# Altium PCB Darlington.PcbDoc
Units mm, origin at the board's own origin, x right, y up, seen from the top; angles counter-clockwise.
Board outline 100 x 100 mm, 2 copper layers (Top Layer, Bottom Layer); 14 components, 7 nets, 33 pads, 0 vias.
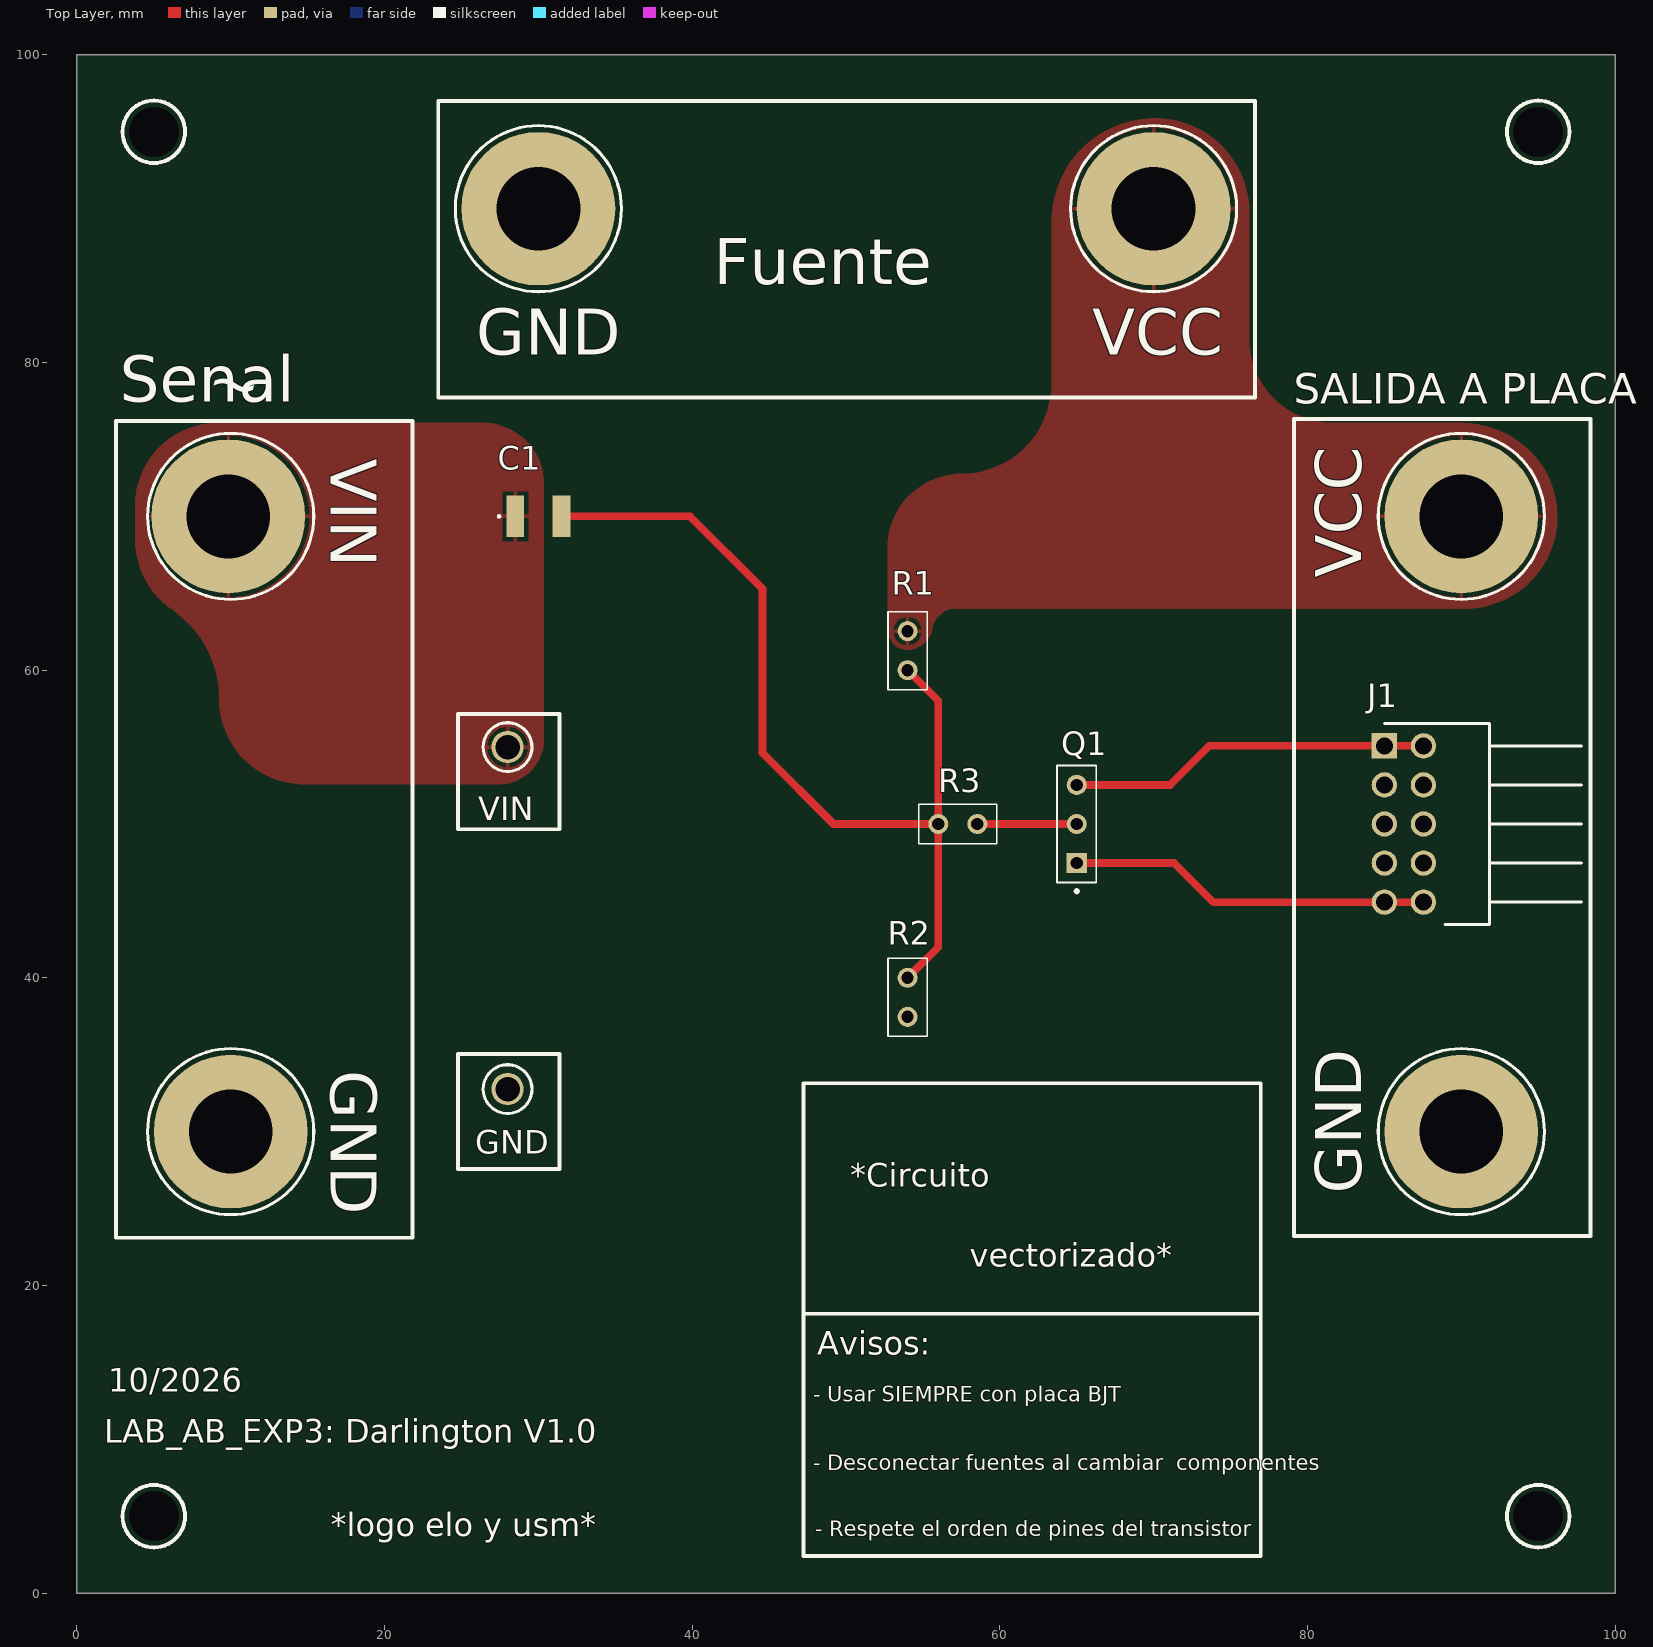
[diagram p0: Top Layer view]
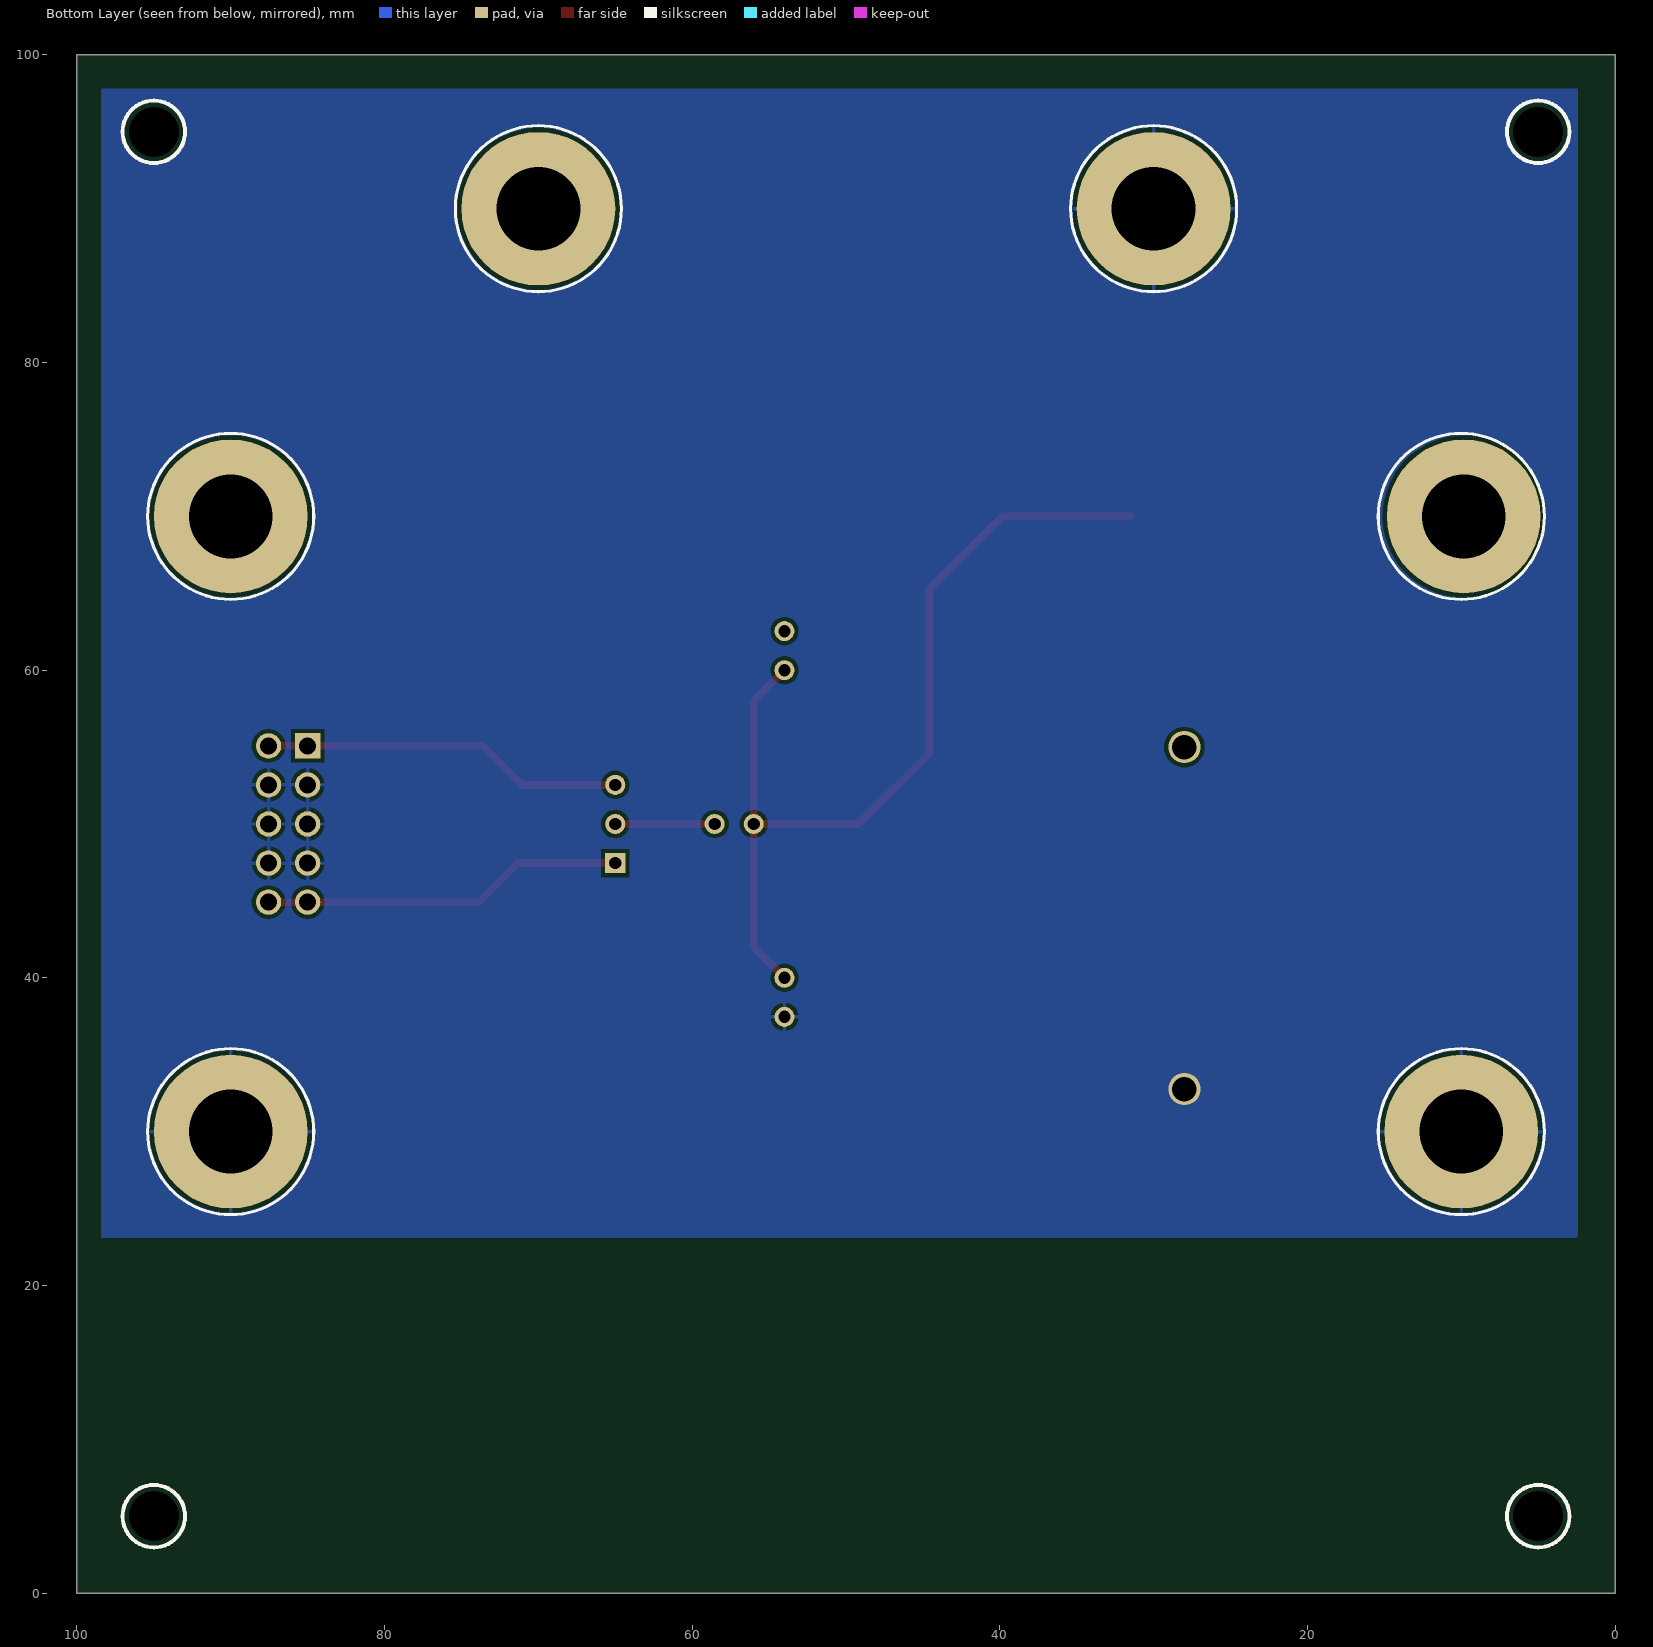
[diagram p1: Bottom Layer view, seen from below]
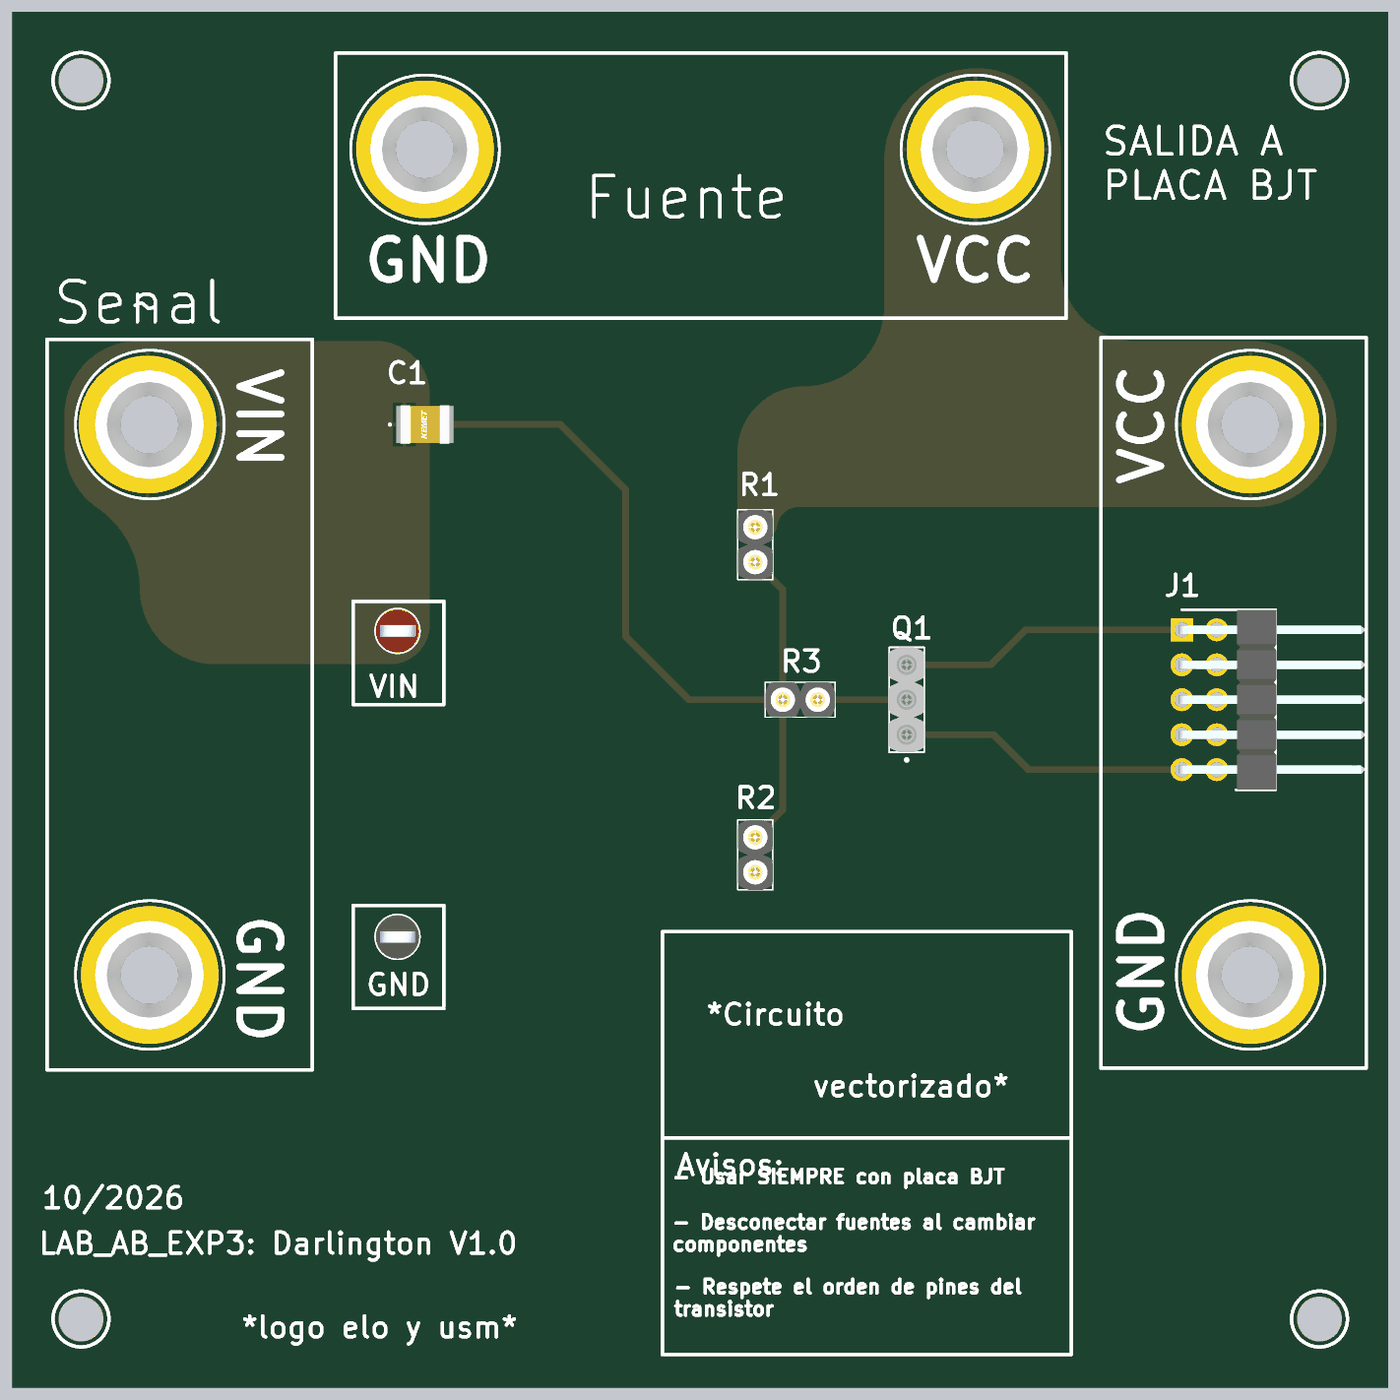
[diagram p2: 3D render of the assembled board from above, using the file's embedded part models]

## Layer stack, top to bottom
Top Solder: solder mask 0.0102, Solder Resist, Dk 3.5
Top Layer: signal copper 0.0356
Dielectric 1: dielectric 0.32, FR-4, Dk 4.8
Bottom Layer: signal copper 0.0356
Bottom Solder: solder mask 0.0102, Solder Resist, Dk 3.5

## Board outline
0,0 100,0 100,100 0,100

## Design rules (kind name [scope] priority, off if disabled: settings)
Clearance [All] p1: gap=0.254 ignorepadtopadclearanceinfootprint=FALSE
HoleSize [All] p1: absolutevalues=TRUE maxlimit=7 minlimit=0.025 maxpercent=80.000 minpercent=20.000
PolygonConnect [All] p1: connectstyle=Relief reliefconductorwidth=0.254 reliefentries=4 polygonreliefangle="90 Angle" airgapwidth=0.254
RoutingVias [All] p1: holewidth=0.711 width=1.27 viastyle="Through Hole" minholewidth=0.711 minwidth=1.27 maxholewidth=0.711 maxwidth=1.27
SolderMaskExpansion [All] p1: expansion=0 istentingtop=FALSE
SupplyNets "Schematic Supply Nets_2" [InNet('+VAC')] p1: voltage=0.000
SupplyNets "Schematic Supply Nets_1" [InNet('VCC')] p2: voltage=0.000
SupplyNets "Schematic Supply Nets" [InNet('GND')] p3: voltage=0.000
Width [All] p1: maxlimit=0.7 minlimit=0.254 preferedwidth=0.254
29 further rules are at their usual default settings.

## Classes and differential pairs
component class Darlington: C1 GND J1 Q1 Q6 R1 R2 R3 R12 R13 R14 VCC_IN VIN

## Components (designator, comment, footprint, x,y, rotation, side; value= is the part's Value field where it differs from the comment)
C1 "C1210C106M3PACTU" C1210 30,70 r0 top locked (schematic designator C2)
GND "575-4" KSTN-575-4#1 90,30 r0 top locked (schematic designator TP2)
GND "5011" KSTN-5011_V 28,32.766 r180 top (schematic designator TP26)
GND "575-4" KSTN-575-4#1 30,90 r0 top locked (schematic designator TP24)
GND "575-4" KSTN-575-4#1 10,30 r0 top locked (schematic designator TP22)
J1 "PH2RA-10-UA" HDRRA10W64P254_2X5_1270X250X538P 85,55.08 r270 top locked (schematic designator J33)
Q1 "D01-9970342" HARWIN_D01-9970342 65,50 r270 top locked (schematic designator J21)
R1 "D01-9970242" D019970242 54,62.54 r90 top locked (schematic designator J18)
R2 "D01-9970242" D019970242 54,40 r90 top locked (schematic designator J20)
R3 "D01-9970242" D019970242 56,50 r180 top locked (schematic designator J19)
VCC "575-4" KSTN-575-4#1 90,70 r0 top locked (schematic designator TP1)
VCC "575-4" KSTN-575-4#1 70,90 r0 top locked (schematic designator TP23)
VIN "5010" KSTN-5010_V 28,55 r180 top (schematic designator TP25)
VIN "575-4" KSTN-575-4#2 10,70 r0 top locked (schematic designator TP21)

## Footprints (in the part's own frame and the unit in brackets; to place one, negate y for a bottom-side part, rotate by r counter-clockwise, add the part's x,y. Pads: shape width x height; smd on the part's side, far side on the other; paste and mask are expansions set on the pad)
C1210 [mm]
  rect 1.15x2.7 smd: 1(-1.5,0) 2(1.5,0)
  silkscreen extent -2.6,-0.05 -2.5,0.05, body extent -1.8,-1.4 1.8,1.4, height 2.1
D019970242 [mm]
  round 1.3 hole 0.8: 1(0,0) 2(-2.54,0)
  silkscreen extent -3.81,-1.27 1.27,1.27, body extent -3.81,-1.27 1.27,1.27, height 4.22
HARWIN_D01-9970342 [mm]
  rect 1.308x1.308 / inner round 1.308 / far side rect 1.308x1.308 hole 0.8: 1(2.54,0)
  round 1.308 hole 0.8: 2(0,0) 3(-2.54,0)
  silkscreen extent -3.81,-1.27 4.47,1.27, body extent -3.81,-1.27 3.81,1.27, height 4.22
HDRRA10W64P254_2X5_1270X250X538P [mm]
  rect 1.65x1.65 / inner round 1.65 / far side rect 1.65x1.65 hole 1.1: 1(0,0)
  round 1.65 hole 1.1: 2(0,2.54) 3(2.54,0) 4(2.54,2.54) 5(5.08,0) 6(5.08,2.54) 7(7.62,0) 8(7.62,2.54) 9(10.16,0) 10(10.16,2.54)
  silkscreen extent -1.46,0 11.62,12.82, body extent -1.46,-0.25 11.62,13.27, height 5.38
KSTN-575-4#1 [mm] "Banana Jack, Non-Insulated, Dia 7.92mm"
  round 10 hole 5.45: 1(0,0)
  silkscreen extent -5.4,-5.4 5.4,5.4, body extent -3.98,-3.96 3.92,3.94, height 2.36
KSTN-575-4#2 [mm] "Banana Jack, Non-Insulated, Dia 7.92mm"
  round 10 hole 5.45: 1(-0.16,0)
  silkscreen extent -5.4,-5.4 5.4,5.4, body extent -3.98,-3.96 3.92,3.94, height 2.36
KSTN-5010_V [mm] "Test Point, Dia 3.17mm"
  round 2.1 hole 1.6: 1(0,0)
  silkscreen extent -1.59,-1.58 1.59,1.58, body extent -1.59,-1.59 1.59,1.59, height 8.13
KSTN-5011_V [mm] "Test Point, Dia 3.17mm"
  round 2.1 hole 1.6: 1(0,0)
  silkscreen extent -1.59,-1.58 1.59,1.58, body extent -1.59,-1.59 1.59,1.59, height 8.13

## Part data
C1: "Capacitor", Manufacturer_Name="Yageo Group", Mouser Part Number=80-C1210C106M3P, Datasheet Link=https://www.yageogroup.com/content/datasheet/asset/file/KEM_C1006_X5R_SMD, Manufacturer_Part_Number=C1210C106M3PACTU, Mouser Price/Stock=https://www.mouser.com/Search/Refine.aspx?Keyword=80-C1210C106M3P
GND GND GND VCC VCC VIN: library part CMP-2000-05649-1, "Banana Jack, Non-Insulated, 1-Pin THD, RoHS, Bulk", Color=-, Manufacturer=Keystone-Electronics, Package Description="1-Pin Through Hole Device, Dia 7.92 mm", Package Version="Rev. B, 11/1994", Body Material=-, Category=Connectors,Interconnects, Contact Finish=Nickel, Contact Material=Brass, Datasheet URL=http://www.keyelco.com/product-pdf.cfm?p=2379, Datasheet Version="Rev. B, 11/1994", Family=BananaandTipConnectors-Jacks,Plugs, Features=-, Gender=Female, Insulation=Non-Insulated, Manufacturer URL=http://www.keyelco.com/, Mounting Technology=ThroughHole, Mounting Type=ThroughHole, Operating Temperature=-, Package Reference=575-4, Package URL=http://www.keyelco.com/product-pdf.cfm?p=2379, Packaging=Bulk, Plug/Mating Plug Diameter=StandardBanana, Series=-, Termination=Solder, Type=BananaJack, Wire Gauge=-
GND: library part CMP-1672-00003-4, "Test Point, Black, Through Hole, RoHS, Bulk", Colour=Black, Manufacturer=Keystone, Package Quantity=100, ComponentLink1Description="Manufacturer URL", ComponentLink1URL=http://www.keyelco.com/, ComponentLink2Description=Datasheet, ComponentLink2URL=http://www.keyelco.com/product-pdf.cfm?p=1320, Contact Material=Bronze, Contact Plating=Silver, DatasheetVersion="Rev. F, 12/2013", Height="8.12 mm", Mount="Through Hole", Mounting Technology="Through Hole", PackageDescription="1-Pin Through Hole Device, Dia 3.17 mm", PackageReference=5011, Packaging=Bulk, Pins=1, REACH SVHC="No SVHC", RoHSCompliant=true
J1: "CONN HEADER R/A 10POS 2.54MM", Manufacturer_Name="Adam Tech", Mouser Part Number=737-PH2RA-10-UA, Datasheet Link=https://app.adam-tech.com/products/download/data_sheet/200508/ph2ra-xx-ua-data-sheet.pdf, Geometry.Height=5.381mm, Manufacturer_Part_Number=PH2RA-10-UA, Mouser Price/Stock=https://www.mouser.co.uk/ProductDetail/Adam-Tech/PH2RA-10-UA?qs=HoCaDK9Nz5eXic%252Bmj6sc5g%3D%3D
Q1: Package=None, Availability=Unavailable, MP=D01-9970342, Price=None
R1 R2 R3: "IC Socket: 2 Pos Receptacle SIL Straight THT Strip", Manufacturer_Name=Harwin, Mouser Part Number=855-D01-9970242, Datasheet Link=https://content.harwin.com/m/e0b6c35948424a73/original/DRG-00097-Technical-Drawing-Datasheet-D01-997-pdf.pdf, Geometry.Height=4.2mm, Manufacturer_Part_Number=D01-9970242, Mouser Price/Stock=https://www.mouser.co.uk/ProductDetail/Harwin/D01-9970242?qs=TpUtqFO9vU%252Bf37OJ5TYoTQ%3D%3D
VIN: library part CMP-1672-00002-4, "Test Point, Red, Through Hole, RoHS, Bulk", Colour=Red, Manufacturer=Keystone, Package Quantity=100, ComponentLink1Description="Manufacturer URL", ComponentLink1URL=http://www.keyelco.com/, ComponentLink2Description=Datasheet, ComponentLink2URL=http://www.keyelco.com/product-pdf.cfm?p=1319, Contact Material=Bronze, Contact Plating=Silver, DatasheetVersion="Rev. F, 12/2013", Height="8.12 mm", Mount="Through Hole", Mounting Technology="Through Hole", PackageDescription="1-Pin Through Hole Device, Dia 3.17 mm", PackageReference=5010, Packaging=Bulk, Pins=1, REACH SVHC="No SVHC", RoHSCompliant=true

## Free pads (board coordinates)
  round 0 hole 3.25: 9(5,5) 9(5,95) 9(95,5) 9(95,95)

## Nets (pads, with @x,y where several pads share a name; then routed paths per layer and width w, separated by ;. In a path a pad name is that pad's centre, name@x,y a point inside that pad or via, vN(x,y) a via of type N, cw(c..) or ccw(c..) an arc to the next point about the centre after c; other vN are vias at no path point)
1: J1.9 J1.10 Q1.1 | length 23.6
  Top Layer w0.5: Q1.1 71.336,47.46 73.876,44.92 J1.9 J1.10
2: J1.1 J1.2 Q1.3 | length 23.6
  Top Layer w0.5: Q1.3 71.082,52.54 73.622,55.08 J1.1 J1.2
+VAC: C1.1 VIN.1
Base: Q1.2 R3.2 | length 6.5
  Top Layer w0.5: R3.2 Q1.2
Center: C1.2 R1.2 R2.1 R3.1 | length 61
  Top Layer w0.254: R1.2@53.802,60.198 R1.2
  Top Layer w0.5: C1.2 39.855,70 44.577,65.278 44.577,54.61 49.187,50 52.235,50 R3.1 ; R2.1 56,42 R3.1 ; R1.2@54.017,60 56,58.017 R3.1
GND: GND.1 J1.3 J1.4 J1.5 J1.6 J1.7 J1.8 R2.2
VCC: R1.1 VCC.1

## Polygon pours and split planes (outlines as drawn)
VCC on Top Layer "VCC_L01_P001" (solid, pour order 1): 57.531,72.771 ccw(c57.531,78.613) 63.373,78.613 63.373,80.01 63.373,89.153 cw(c70.105,89.153) 70.105,95.885 cw(c70.105,89.79) 76.2,89.79 76.2,81.534 ccw(c81.661,81.534) 81.661,76.073 89.917,76.073 cw(c89.918,69.464) 93.466,75.04 cw(c90.254,69.991) 90.254,64.008 57.15,64.008 ccw(c57.15,62.448) 55.615,62.727 cw(c53.909,63.037) 54.224,61.332 cw(c54,62.542) 52.772,62.476 cw(c99.717,64.977) 52.705,64.977 52.705,67.945 cw(c57.531,67.945)
+VAC on Top Layer "+VAC_L01_P000" (solid, pour order 0): 9.144,76.073 26.416,76.073 cw(c26.416,72.136) 30.353,72.136 30.353,55.499 cw(c27.432,55.499) 27.432,52.578 14.789,52.578 cw(c14.789,58.096) 9.271,58.096 ccw(c2.18,58.096) 6.186,63.947 cw(c9.271,68.453) 3.81,68.453 3.81,70.739 cw(c9.144,70.739)
GND on Bottom Layer "GND_L02_P002" (solid, pour order 2): 2.54,23.114 2.413,23.241 2.413,97.79 98.425,97.79 98.425,23.114 2.413,23.114

## Silkscreen, mask and mechanical layers (free items; w line width, h text height)
Top Overlay:
  circle w0.254: c95,95 r2.031
  circle w0.254: c95,5 r2.031
  circle w0.254: c5,95 r2.031
  circle w0.254: c5,5 r2.031
  lines w0.254: 47.244,18.161 76.835,18.161 ; 2.54,23.102 21.807,23.102 21.807,76.2 2.54,76.2 2.54,23.102 ; 23.495,77.724 23.495,96.991 76.593,96.991 76.593,77.724 23.495,77.724 ; 24.765,27.559 31.369,27.559 31.369,35.052 24.765,35.052 24.765,27.559 ; 24.765,49.657 31.369,49.657 31.369,57.15 24.765,57.15 24.765,49.657 ; 47.244,2.413 76.962,2.413 76.962,33.147 47.244,33.147 47.244,2.413 ; 79.121,23.229 98.388,23.229 98.388,76.327 79.121,76.327 79.121,23.229
  text "Fuente" at 41.402,85.074 h3
  text "~" at 8.232,77.641 h3 r346.5
  text "Senal" at 2.794,77.454 h3
  text "SALIDA A PLACA BJT" at 79.121,77.327 h2
  text "*Circuito" at 50.292,26.416 h1.52
  text "vectorizado*" at 58.039,21.209 h1.52
  text "Avisos:" at 48.133,15.494 h1.52
  text "10/2026" at 2.032,13.081 h1.52
  text "- Usar SIEMPRE con placa BJT" at 47.879,12.446 h1
  text "LAB_AB_EXP3: Darlington V1.0" at 1.778,9.779 h1.52
  text "- Desconectar fuentes al cambiar  componentes" at 47.879,8.001 h1
  text "*logo elo y usm*" at 16.51,3.683 h1.52
  text "- Respete el orden de pines del transistor" at 48.006,3.683 h1
Bottom Overlay:
  circle w0.254: c95,95 r2.031
  circle w0.254: c95,5 r2.031
  circle w0.254: c5,95 r2.031
  circle w0.254: c5,5 r2.031